# Altium PCB TFT_CONVERT_BORAD.PcbDoc
Units mil, origin at the board's own origin, x right, y up, seen from the top; angles counter-clockwise.
Board outline 1409.45 x 2047.24 mil, 2 copper layers (Top Layer, Bottom Layer), stack 57.918 mil thick; 5 components, 10 nets, 32 pads, 9 vias.
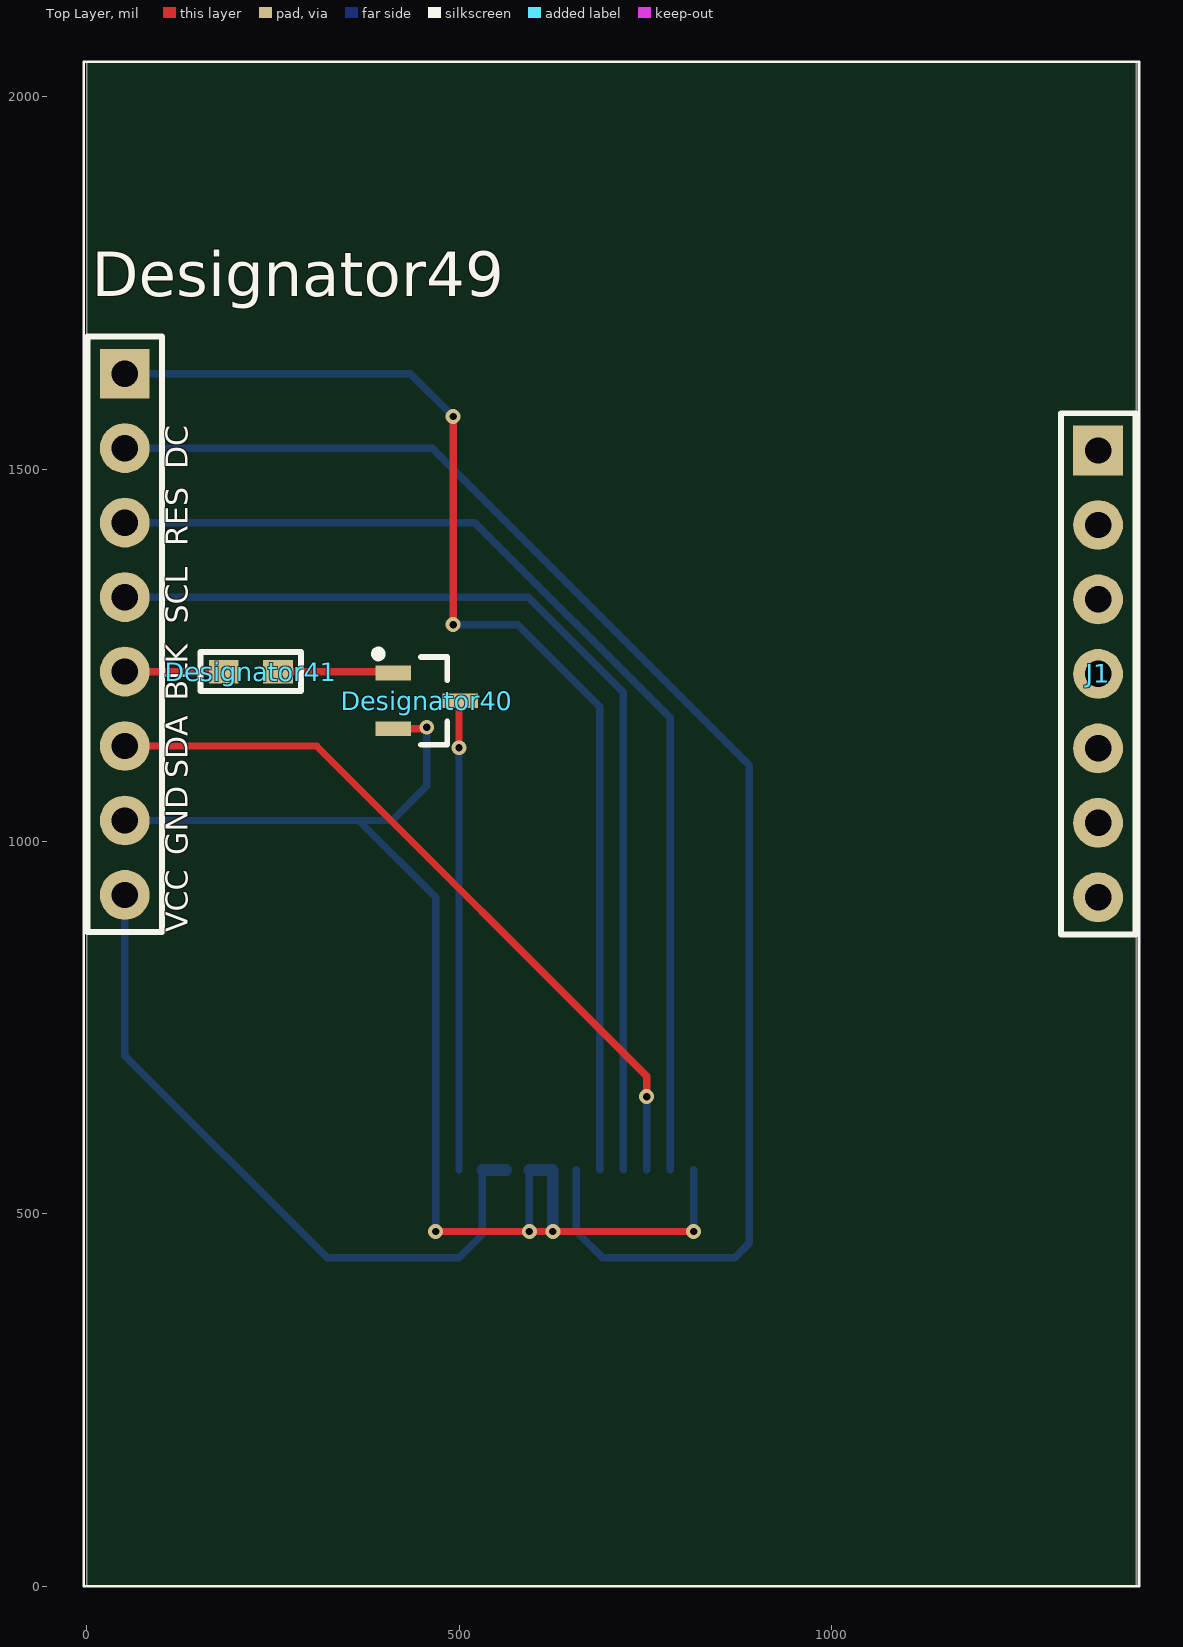
[diagram p0: Top Layer view]
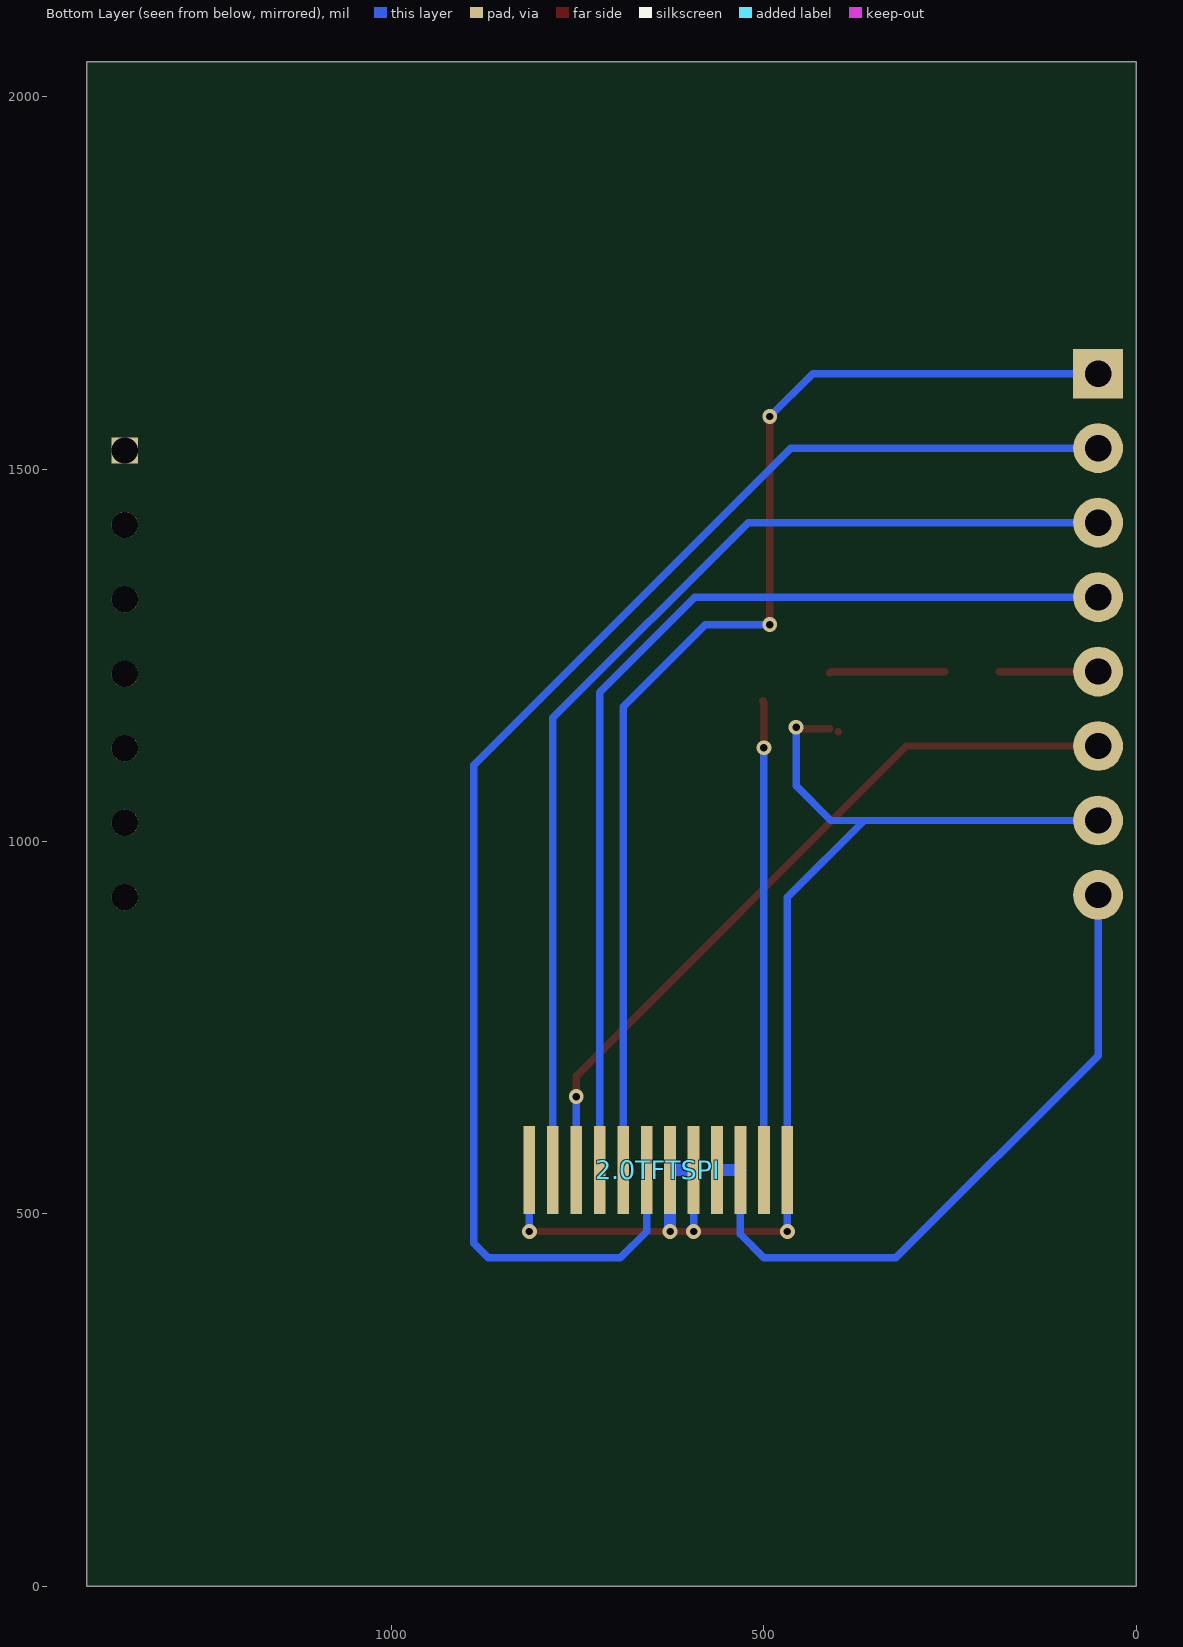
[diagram p1: Bottom Layer view, seen from below]

## Layer stack, top to bottom
Top Solder: solder mask 0.4, Solder Resist, Dk 3.5
Top Layer: signal copper 1.4
Dielectric 1: dielectric 55.1181, FR-4, Dk 4.8
Bottom Layer: signal copper 1.4
Bottom Solder: solder mask 0.4, Solder Resist, Dk 3.5

## Board outline
0,0 0,2047.24 1409.45,2047.24 1409.45,0

## Design rules (kind name [scope] priority, off if disabled: settings)
Clearance [All] p1: gap=10 ignorepadtopadclearanceinfootprint=FALSE except(0: Arc-Hole Track-Hole SMDPad-Hole THPad-Hole Via-Hole Fill-Hole Poly-Hole Region-Hole Text-Hole)
ComponentClearance [All] p1 off: gap=10 collisioncheckmode=3 verticalgap=10 showdistances=FALSE
Height [All] p1 off: minheight=0 maxheight=1000 prefheight=500
PolygonConnect [All] p1: connectstyle=Relief reliefconductorwidth=10 reliefentries=4 polygonreliefangle="90 Angle" airgapwidth=10
RoutingVias [All] p1: holewidth=10 width=20 viastyle="Through Hole" minholewidth=10 minwidth=20 maxholewidth=10 maxwidth=20
SolderMaskExpansion [All] p1: expansion=4
Width [All] p1: maxlimit=30 minlimit=10 preferedwidth=10 minimp=50.000000 maximp=50.000000 favimp=50.000000
28 further rules are at their usual default settings.

## Components (designator, comment, footprint, x,y, rotation, side; value= is the part's Value field where it differs from the comment)
2.0TFTSPI "2.0TFT" 2.0TFT -3.94,2047.24 r0 top locked (schematic designator 1)
Designator40 "Comment" SOT23-3N 456.69,1188.98 r270 top
Designator41 "Comment" "R 0603_M" 220.47,1228.35 r0 top
Designator49 "Comment" HDR2.54-LI-8P 51.18,1278.35 r270 top
J1 "Comment" HDR2.54-LI-7P 1358.27,1225.2 r270 top locked

## Footprints (in the part's own frame and the unit in brackets; to place one, negate y for a bottom-side part, rotate by r counter-clockwise, add the part's x,y. Pads: shape width x height; smd on the part's side, far side on the other; paste and mask are expansions set on the pad)
2.0TFT [mm] "0.8MM12PIN"
  rect 0.4x3 smd far side: 1(12,-37.8) 2(12.8,-37.8) 3(13.6,-37.8) 4(14.4,-37.8) 5(15.2,-37.8) 6(16,-37.8) 7(16.8,-37.8) 8(17.6,-37.8) 9(18.4,-37.8) 10(19.2,-37.8) 11(20,-37.8) 12(20.8,-37.8)
  silkscreen extent 0,-52 36,0
HDR2.54-LI-7P [mm] "排针，8脚"
  rect 1.7x1.7 / inner rect 0.9x0.9 / far side rect 0.9x0.9 hole 0.9: 1(-7.62,0)
  round 1.7 / inner round 0.9 / far side round 0.9 hole 0.9: 2(-5.08,0) 3(-2.54,0) 4(0,0) 5(2.54,0) 6(5.08,0) 7(7.62,0)
  silkscreen extent -8.89,-1.27 8.89,1.27, body extent -8.89,-1.27 8.89,1.27, height 8.5
HDR2.54-LI-8P [mm] "排针，8脚"
  rect 1.7x1.7 hole 0.9: 1(-8.89,0)
  round 1.7 hole 0.9: 2(-6.35,0) 3(-3.81,0) 4(-1.27,0) 5(1.27,0) 6(3.81,0) 7(6.35,0) 8(8.89,0)
  silkscreen extent -10.16,-1.27 10.16,1.27, body extent -10.16,-1.27 10.16,1.27, height 8.5
"R 0603_M" [mil] "1/10W贴片电阻"
  rect 40x31.5 smd: 1(-36.5,0) 2(36.5,0)
  silkscreen extent -68,-26 68,26, body extent -31,-16 31,16, height 16
SOT23-3N [mm] "3x1.3x1mm(长宽高)"
  rect 0.5x1.2 smd: 1(-0.95,-1.143) 2(0.95,-1.143) 3(0,1.143)
  silkscreen extent -1.72,-1.78 1.5,0.7, body extent -1.5,-1.2 1.5,1.2, height 1.05

## Via types
v1: diameter 20, hole 10, Top Layer to Bottom Layer, 9 vias

## Nets (pads, with @x,y where several pads share a name; then routed paths per layer and width w, separated by ;. In a path a pad name is that pad's centre, name@x,y a point inside that pad or via, vN(x,y) a via of type N, cw(c..) or ccw(c..) an arc to the next point about the centre after c; other vN are vias at no path point)
BLK: 2.0TFTSPI.2 Designator40.3 | length 630.6
  Top Layer w10: v1(500,1125.98) 500,1187.28 Designator40.3
  Bottom Layer w10: 2.0TFTSPI.2 v1(500,1125.98)
BLK_EN: Designator41.1 Designator49.5 | length 132.8
  Top Layer w10: Designator49.5 Designator41.1
BLK_R: Designator40.1 Designator41.2 | length 155.5
  Top Layer w10: Designator41.2 409.72,1228.35 Designator40.1
CS: 2.0TFTSPI.8 Designator49.1 | length 1608.8
  Top Layer w10: v1(492.13,1291.34) v1(492.13,1570.87)
  Bottom Layer w10: Designator49.1 434.65,1628.35 v1(492.13,1570.87) ; v1(492.13,1291.34) 578.74,1291.34 688.98,1181.1 2.0TFTSPI.8
DC: 2.0TFTSPI.7 Designator49.2 | length 1994.6
  Bottom Layer w10: Designator49.2 463.78,1528.35 889.76,1102.36 889.76,460.63 870.08,440.94 692.91,440.94 657.48,476.38 2.0TFTSPI.7
GND: 2.0TFTSPI.1 2.0TFTSPI.5 2.0TFTSPI.6 2.0TFTSPI.12 Designator40.2 Designator49.7 | length 1770
  Top Layer w10: Designator40.2 452.02,1151.57 453.99,1153.54 v1(456.69,1153.54) ; v1(468.5,476.38) v1(594.49,476.38) v1(625.98,476.38) v1(814.96,476.38)
  Bottom Layer w10: Designator49.7 365.35,1028.35 ; v1(456.69,1153.54) 456.69,1074.8 410.24,1028.35 365.35,1028.35 ; v1(468.5,476.38) 2.0TFTSPI.1 468.5,925.2 365.35,1028.35 ; v1(594.49,476.38) 2.0TFTSPI.5 ; v1(814.96,476.38) 2.0TFTSPI.12
  Bottom Layer w15.75: 2.0TFTSPI.5 2.0TFTSPI.6 v1(625.98,476.38)
RES: 2.0TFTSPI.11 Designator49.3 | length 1447.9
  Bottom Layer w10: Designator49.3 521.2,1428.35 783.46,1166.08 2.0TFTSPI.11
SCL: 2.0TFTSPI.9 Designator49.4 | length 1363.9
  Bottom Layer w10: Designator49.4 592.91,1328.35 720.47,1200.79 2.0TFTSPI.9
SDA: 2.0TFTSPI.10 Designator49.6 | length 1010.4
  Top Layer w10: Designator49.6 308.66,1128.35 751.97,685.04 v1(751.97,657.48)
  Bottom Layer w10: 2.0TFTSPI.10 v1(751.97,657.48)
VDD: 2.0TFTSPI.3 2.0TFTSPI.4 Designator49.8 | length 939.7
  Bottom Layer w10: Designator49.8 51.18,712.6 322.83,440.94 500,440.94 531.5,472.44 2.0TFTSPI.3
  Bottom Layer w15.75: 2.0TFTSPI.3 2.0TFTSPI.4
pads on no net: J1.1 J1.2 J1.3 J1.4 J1.5 J1.6 J1.7

## Polygon pours and split planes (outlines as drawn)
no net on Bottom Layer "Bottom Layer-No Net" (solid, remove dead copper, pour order 0): 661.42,551.18

## Silkscreen, mask and mechanical layers (free items; w line width, h text height)
Top Overlay:
  text "DC" at 145.67,1500 h50 r90
  text "RES" at 145.67,1396.32 h50 r90
  text "SCL" at 145.67,1292.64 h50 r90
  text "BLK" at 145.67,1188.98 h50 r90
  text "SDA" at 145.67,1085.27 h50 r90
  text "GND" at 145.67,981.59 h50 r90
  text "VCC" at 145.67,877.95 h50 r90
Mechanical 1:
  the board outline again, w1.97